# Altium PCB SW-SMD_SIQ-02FVS3_1_2022-03-15.pcbdoc
Units mm, origin at the board's own origin, x right, y up, seen from the top; angles counter-clockwise.
Board outline 42.44 x 41.43 mm, 2 copper layers (Top Layer, Bottom Layer); 1 components, 0 nets, 10 pads, 0 vias.
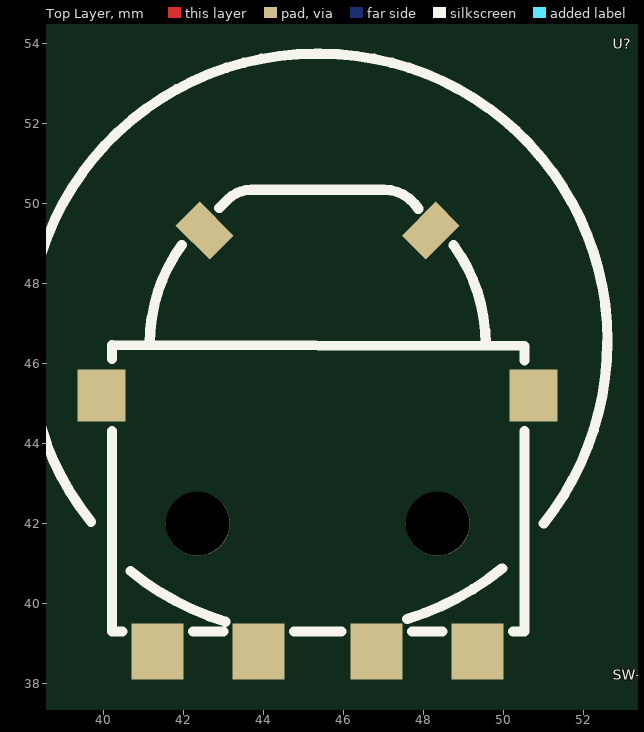
[diagram p0: Top Layer view]
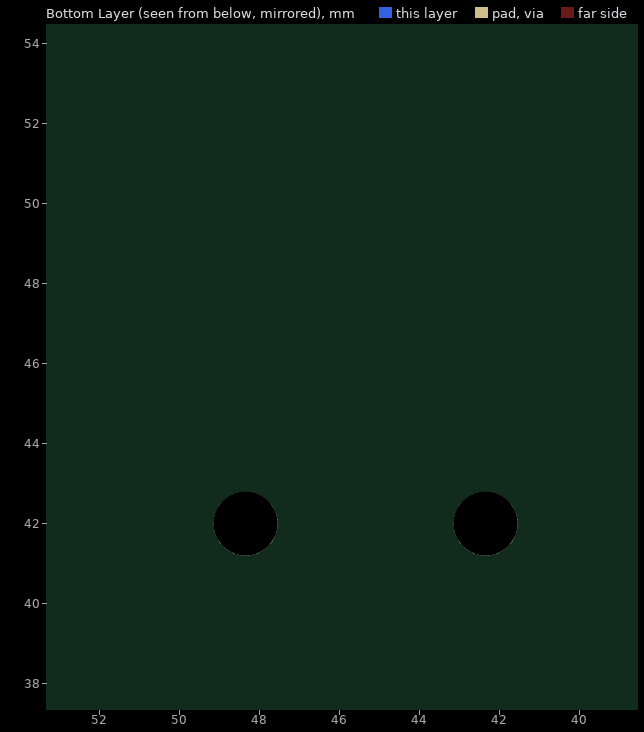
[diagram p1: Bottom Layer view, seen from below]

## Layer stack, top to bottom
Top Layer: signal copper (thickness not stored)
Dielectric: dielectric 0.32, FR-4, Dk 4.8
Bottom Layer: signal copper (thickness not stored)

## Board outline
67.839,25.4 25.4,25.4 25.4,66.831 67.839,66.831

## Components (designator, comment, footprint, x,y, rotation, side; value= is the part's Value field where it differs from the comment)
U? "SW-SMD_SIQ-02FVS3_1" SW-SMD_SIQ-02FVS3_1 45.413,45.989 r0 top

## Footprints (in the part's own frame and the unit in brackets; to place one, negate y for a bottom-side part, rotate by r counter-clockwise, add the part's x,y. Pads: shape width x height; smd on the part's side, far side on the other; paste and mask are expansions set on the pad)
SW-SMD_SIQ-02FVS3_1 [mm]
  rect 1.2x1.3 smd: 0(-5.46,-0.788) 0(5.34,-0.788)
  rect 0.85x1.2 smd rot 45: 0(-2.888,3.34)
  rect 0.85x1.2 smd rot 135: 0(2.769,3.34)
  rect 1.3x1.4 smd: A(-4.06,-7.189) B(3.94,-7.189) C(1.415,-7.189) S(-1.535,-7.189)
  round 1.6 hole 1.6 unplated: ""(-3.06,-3.989) ""(2.94,-3.989)
  silkscreen extent -7.31,-6.68 7.19,7.76

## Nets (pads, with @x,y where several pads share a name; then routed paths per layer and width w, separated by ;. In a path a pad name is that pad's centre, name@x,y a point inside that pad or via, vN(x,y) a via of type N, cw(c..) or ccw(c..) an arc to the next point about the centre after c; other vN are vias at no path point)
pads on no net: U?. U?.0 U?.A U?.B U?.C U?.S